# Altium PCB PCB1.PcbDoc
Units mil, origin at the board's own origin, x right, y up, seen from the top; angles counter-clockwise.
Board outline 7750 x 5745 mil, 4 copper layers (Top Layer, Plane (GRD), Plane (PWR - ask), Bottom Layer), stack 23.756 mil thick; 30 components, 20 nets, 64 pads, 0 vias.
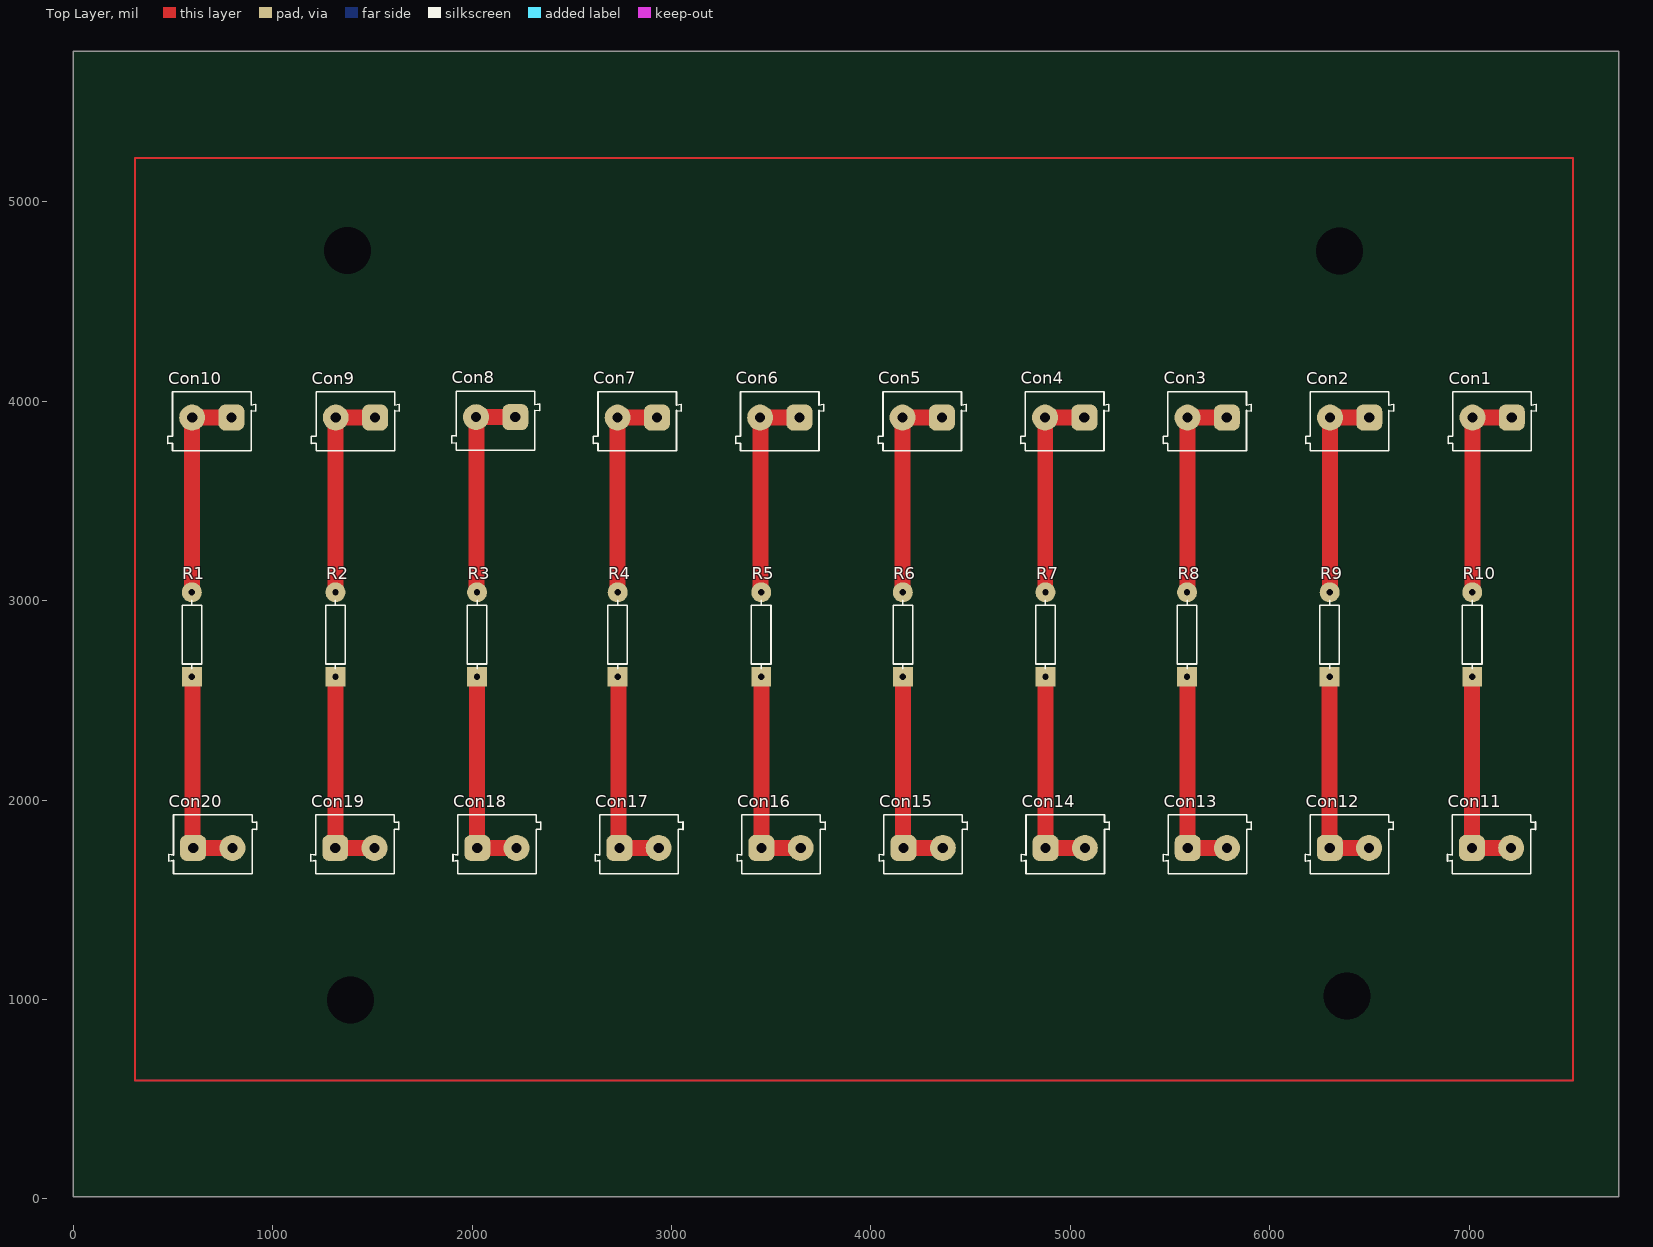
[diagram p0: Top Layer view]
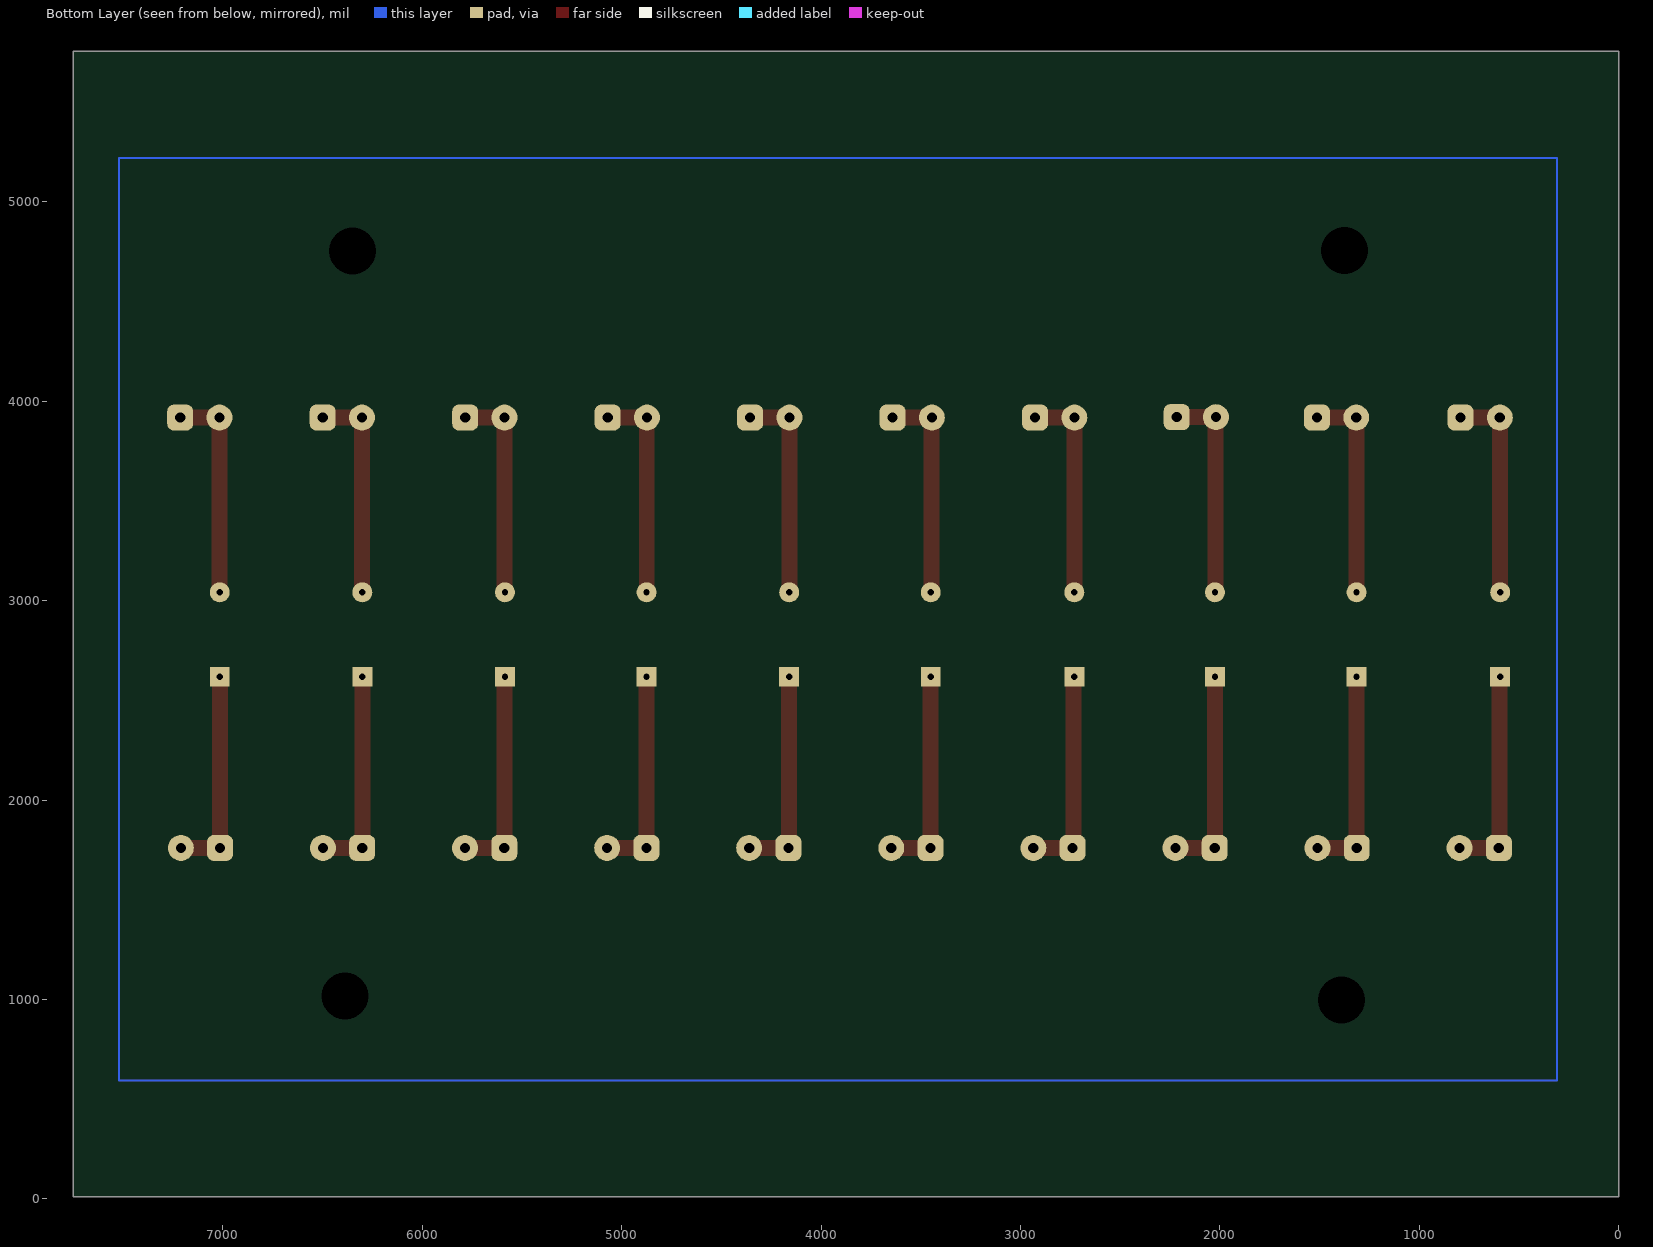
[diagram p1: Bottom Layer view, seen from below]
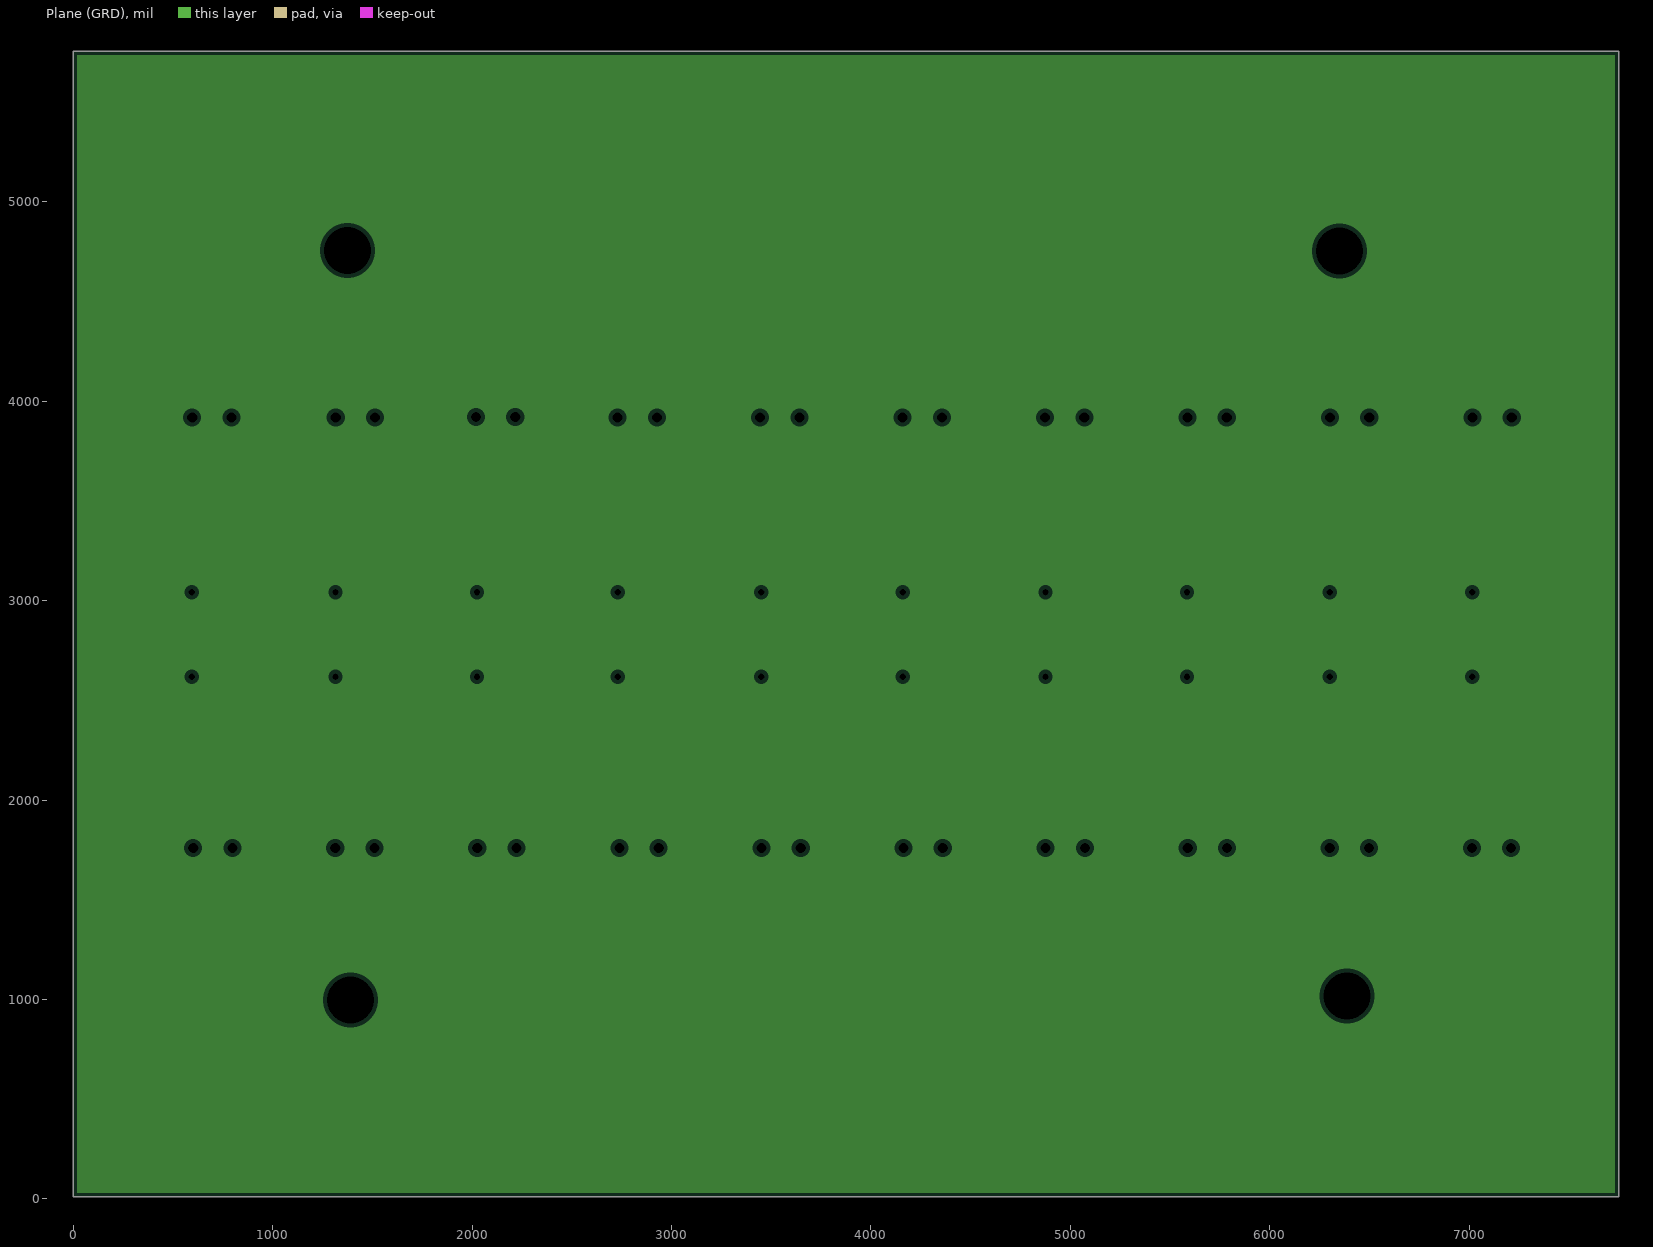
[diagram p2: Plane (GRD), clearances drawn from the general rule]
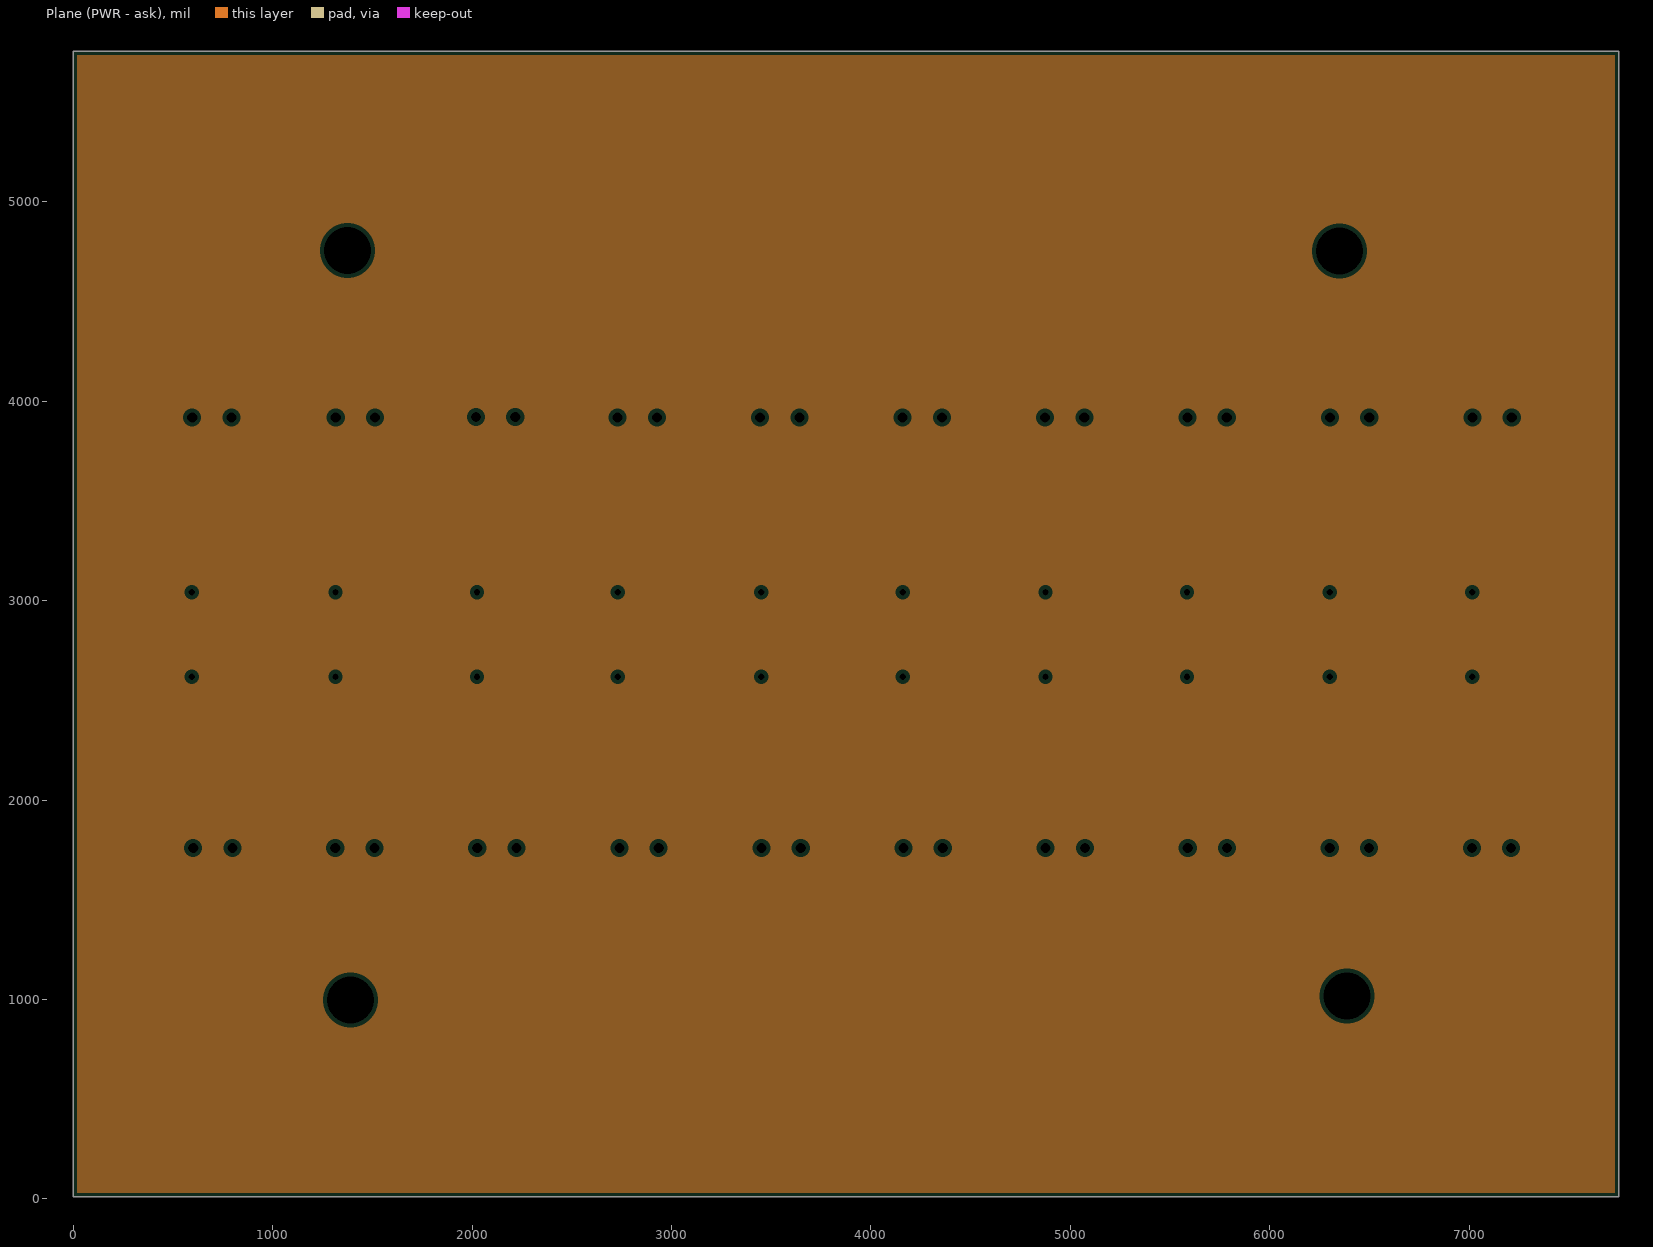
[diagram p3: Plane (PWR - ask), clearances drawn from the general rule]
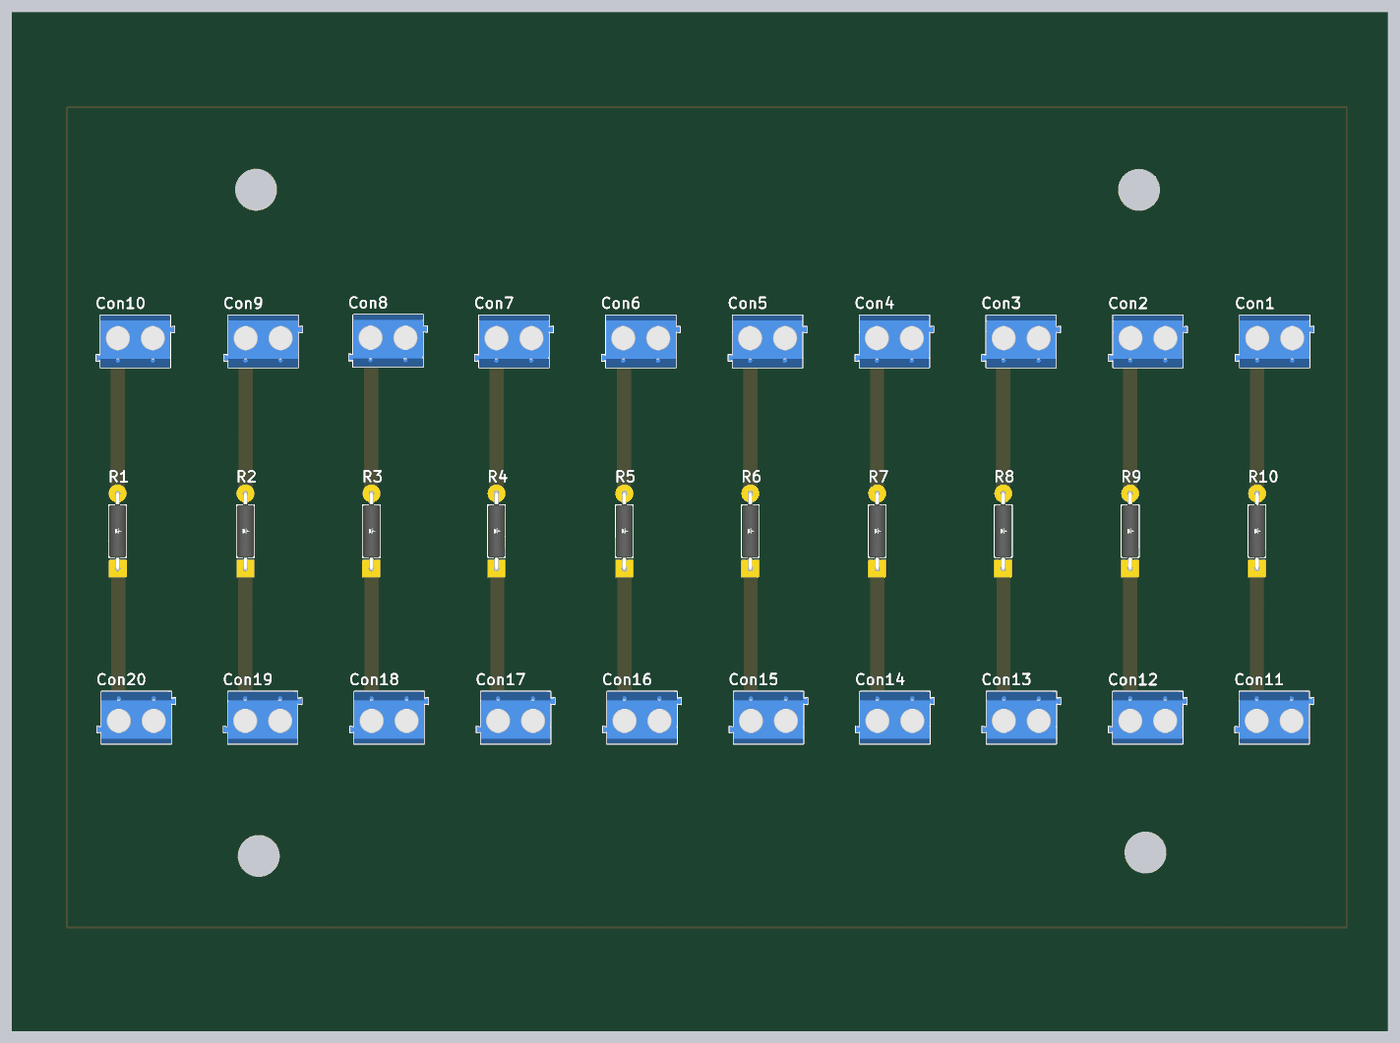
[diagram p4: 3D render of the assembled board from above, using the file's embedded part models]

## Layer stack, top to bottom
Top Solder: solder mask 0.4, Solder Resist, Dk 3.5
Top Layer: signal copper 1.4
Dielectric 2: prepreg 2.8, PP-006, Dk 4.1
Plane (GRD): plane copper 1.378
Dielectric 1: dielectric 12.6, FR-4, Dk 4.8
Plane (PWR - ask): plane copper 1.378
Dielectric 3: prepreg 2.8, PP-006, Dk 4.1
Bottom Layer: signal copper 1.4
Bottom Solder: solder mask 0.4, Solder Resist, Dk 3.5

## Board outline
0,5755 0,10 7750,10 7750,5755

## Design rules (kind name [scope] priority, off if disabled: settings)
Clearance [All] p1: gap=10 ignorepadtopadclearanceinfootprint=FALSE except(20: Arc-Fill Arc-Poly Arc-Region Track-Fill Track-Poly Track-Region SMDPad-Fill SMDPad-Poly SMDPad-Region THPad-Fill THPad-Poly THPad-Region Via-Fill Via-Poly Via-Region Fill-Fill Fill-Poly Fill-Region Poly-Poly Poly-Region Region-Region)
PlaneClearance [All] p1: clearance=20
PlaneConnect [All] p1: planeconnectstyle=Relief reliefexpansion=20 reliefentries=4 reliefconductorwidth=10 reliefairgap=10
PolygonConnect [All] p1: connectstyle=Relief reliefconductorwidth=10 reliefentries=4 polygonreliefangle="90 Angle" airgapwidth=10
RoutingVias [All] p1: holewidth=28 width=100 viastyle="Through Hole" minholewidth=28 minwidth=50 maxholewidth=28 maxwidth=100
SolderMaskExpansion [All] p1: expansion=4 istentingtop=FALSE
Width [All] p1: maxlimit=100 minlimit=5 preferedwidth=40 bottomlayer_maxwidth=50 minimp=50.000000 maximp=50.000000 favimp=50.000000 checkconnectedcopper=TRUE
28 further rules are at their usual default settings.

## Components (designator, comment, footprint, x,y, rotation, side; value= is the part's Value field where it differs from the comment)
Con1 "691102710002" 691102710002 7115,3900 r180 top
Con2 "691102710002" 691102710002 6400.56,3900 r180 top
Con3 "691102710002" 691102710002 5686.11,3900 r180 top
Con4 "691102710002" 691102710002 4971.67,3900 r180 top
Con5 "691102710002" 691102710002 4257.22,3900 r180 top
Con6 "691102710002" 691102710002 3542.78,3900 r180 top
Con7 "691102710002" 691102710002 2828.33,3900 r180 top
Con8 "691102710002" 691102710002 2118.43,3902.28 r180 top
Con9 "691102710002" 691102710002 1415,3900 r180 top
Con10 "691102710002" 691102710002 695,3900 r180 top
Con11 "691102710002" 691102710002 7111.57,1777.72 r0 top
Con12 "691102710002" 691102710002 6399.18,1777.72 r0 top
Con13 "691102710002" 691102710002 5686.78,1777.72 r0 top
Con14 "691102710002" 691102710002 4974.38,1777.72 r0 top
Con15 "691102710002" 691102710002 4261.99,1777.72 r0 top
Con16 "691102710002" 691102710002 3549.59,1777.72 r0 top
Con17 "691102710002" 691102710002 2837.19,1777.72 r0 top
Con18 "691102710002" 691102710002 2124.79,1777.72 r0 top
Con19 "691102710002" 691102710002 1412.4,1777.72 r0 top
Con20 "691102710002" 691102710002 700,1777.72 r0 top
R1 "CCF5526K7FKE36" FP-CCF55-MFG 595,2830 r90 top
R2 "CCF5526K7FKE36" FP-CCF55-MFG 1315,2830 r90 top
R3 "CCF5526K7FKE36" FP-CCF55-MFG 2025,2830 r90 top
R4 "CCF5526K7FKE36" FP-CCF55-MFG 2730,2830 r90 top
R5 "CCF5526K7FKE36" FP-CCF55-MFG 3450,2830 r90 top
R6 "CCF5526K7FKE36" FP-CCF55-MFG 4160,2830 r90 top
R7 "CCF5526K7FKE36" FP-CCF55-MFG 4875,2830 r90 top
R8 "CCF5526K7FKE36" FP-CCF55-MFG 5585,2830 r90 top
R9 "CCF5526K7FKE36" FP-CCF55-MFG 6300,2830 r90 top
R10 "CCF5526K7FKE36" FP-CCF55-MFG 7015,2830 r90 top

## Footprints (in the part's own frame and the unit in brackets; to place one, negate y for a bottom-side part, rotate by r counter-clockwise, add the part's x,y. Pads: shape width x height; smd on the part's side, far side on the other; paste and mask are expansions set on the pad)
691102710002 [mil] "5,00mm - modular - blue - Horizontal entry with pressure clamp - 9,9 mm height - 02p"
  rrect50% 130x130 hole 51.18: 1(-98.43,-17.72)
  round 130 hole 51.18: 2(98.43,-17.72)
  silkscreen extent -220,-148 220,148, body extent -220,-148 220,148, height 392
FP-CCF55-MFG [mm]
  rect 2.54x2.54 hole 0.8 paste-2539.97 mask+0: 1(-5.38,0)
  round 2.54 hole 0.8 paste-2539.97 mask+0: 2(5.38,0)
  silkscreen extent -4.33,-1.24 4.33,1.24, body extent -6.13,-1.35 6.13,1.35, height 0.25

## Part data
Con1 Con2 Con3 Con4 Con5 Con6 Con7 Con8 Con9 Con10 Con11 Con12 Con13 Con14 Con15 Con16 Con17 Con18 Con19 Con20: library part CMP-1502-03258-2, Color=Blue, Current=15A, Max Operating Temperature=105°C, Min Operating Temperature=-40°C, Voltage=300V, Contact Material=Brass, Contact Plating=Tin, Current Rating=15A, Height=13.4mm, Housing Material=Nylon, Lead Pitch=5mm, Length=7.5mm, Mount="Through Hole", NexarPartId=8917706, Number of Contacts=2, Number of Levels=1, Number of Pins=2, Number of Positions Per Level=2, Packaging=Box, Pitch=5.0038mm, Plating=Steel, REACH SVHC=Unknown, RoHS=Compliant, Stripping Length=-6mm, Termination=Screw, Voltage Rating=300V, Width=11.2mm, Wire Gauge (Max)=22AWG, Wire Gauge (Min)=14AWG, Wire/Cable Gauge=22AWG
R1 R2 R3 R4 R5 R6 R7 R8 R9 R10: library part CMP-00030-42465748-1, "CCF5526K7FKE36 Res Metal Film 26.7K Ohm 1% 1/4W 1/2W ±100ppm/°C Conformal AXL Thru-Hole T/R", Case/Package=Conformal, Max Operating Temperature=165°C, Min Operating Temperature=-65°C, Power Rating=500mW, Resistance=26.7kΩ, Temperature Coefficient=100ppm/°C, Tolerance=1%, Voltage Rating=250V, Composition="Metal Film", Contact Plating=Tin, Diameter=2.29mm, Lead Diameter=640µm, Lead Free="Lead Free", Length=6.73mm, Military Standard=Not, Mount="Through Hole", NexarPartId=42465748, Radiation Hardening=No, RoHS=Compliant, Termination=Axial

## Free pads (board coordinates)
  round 60 hole 236: Sc1(1390,997.84) Sc2(1375,4755) Sc3(6350,4754.08) Sc5(6386.56,1017.16)

## Nets (pads, with @x,y where several pads share a name; then routed paths per layer and width w, separated by ;. In a path a pad name is that pad's centre, name@x,y a point inside that pad or via, vN(x,y) a via of type N, cw(c..) or ccw(c..) an arc to the next point about the centre after c; other vN are vias at no path point)
ContoR1: Con10.1 Con10.2 R1.2 | length 1073.4
  Top Layer w80: R1.2 595.79,3042.6 595.79,3916.93 Con10.2 Con10.1
ContoR2: Con20.1 Con20.2 R1.1 | length 1057.8
  Top Layer w80: R1.1 598.29,2614.9 598.29,1763.29 Con20.1 Con20.2
ContoR3: Con9.1 Con9.2 R2.2 | length 1073.4
  Top Layer w80: R2.2 1315.79,3042.6 1315.79,3916.93 Con9.2 Con9.1
ContoR4: Con19.1 Con19.2 R2.1 | length 1055.5
  Top Layer w80: R2.1 1314.49,2617.68 1314.49,1760.51 Con19.1 Con19.2
ContoR5: Con8.1 Con8.2 R3.2 | length 1077.1
  Top Layer w80: R3.2 2022.5,3044.31 2022.5,3917.5 Con8.2 Con8.1
ContoR6: Con18.1 Con18.2 R3.1 | length 1055.6
  Top Layer w80: R3.1 2025.68,2617.5 2025.68,1760.68 Con18.1 Con18.2
ContoR7: Con7.1 Con7.2 R4.2 | length 1072.8
  Top Layer w80: R4.2 2729.95,3041.86 2729.95,3917.67 Con7.2 Con7.1
ContoR8: Con17.1 Con17.2 R4.1 | length 1058.7
  Top Layer w80: R4.1 2734.38,2613.81 2734.38,1764.38 Con17.1 Con17.2
ContoR9: Con6.1 Con6.2 R5.2 | length 1075.1
  Top Layer w80: R5.2 3447.18,3044.63 3447.18,3914.89 Con6.2 Con6.1
ContoR10: Con16.1 Con16.2 R5.1 | length 1055.5
  Top Layer w80: R5.1 3450.58,2617.61 3450.58,1760.58 Con16.1 Con16.2
ContoR11: Con5.1 Con5.2 R6.2 | length 1073.3
  Top Layer w80: R6.2 4159.4,3042.41 4159.4,3917.12 Con5.2 Con5.1
ContoR12: Con15.1 Con15.2 R6.1 | length 1056.5
  Top Layer w80: R6.1 4161.78,2616.41 4161.78,1761.78 Con15.1 Con15.2
ContoR13: Con4.1 Con4.2 R7.2 | length 1073.5
  Top Layer w80: R7.2 4874.12,3042.69 4874.12,3916.84 Con4.2 Con4.1
ContoR14: Con14.1 Con14.2 R7.1 | length 1055.4
  Top Layer w80: R7.1 4875.48,2617.71 4875.48,1760.48 Con14.1 Con14.2
ContoR15: Con3.1 Con3.2 R8.2 | length 1073.9
  Top Layer w80: R8.2 5586.34,3043.15 5586.34,3916.37 Con3.2 Con3.1
ContoR16: Con13.1 Con13.2 R8.1 | length 1056.4
  Top Layer w80: R8.1 5586.68,2616.51 5586.68,1761.68 Con13.1 Con13.2
ContoR17: Con2.1 Con2.2 R9.2 | length 1073.6
  Top Layer w80: R9.2 6301.07,3042.88 6301.07,3916.65 Con2.2 Con2.1
ContoR18: Con12.1 Con12.2 R9.1 | length 1055.4
  Top Layer w80: R9.1 6300.38,2617.81 6300.38,1760.38 Con12.1 Con12.2
ContoR19: Con1.1 Con1.2 R10.2 | length 1073.4
  Top Layer w80: R10.2 7015.79,3042.6 7015.79,3916.93 Con1.2 Con1.1
ContoR20: Con11.1 Con11.2 R10.1 | length 1055.8
  Top Layer w80: R10.1 7014.07,2617.26 7014.07,1760.93 Con11.1 Con11.2

## Polygon pours and split planes (outlines as drawn)
no net on Plane (GRD) (split plane): 7729.9,30.1 20.1,30.1 20.1,5734.9 7729.9,5734.9
no net on Plane (PWR - ask) (split plane): 7729.9,30.1 20.1,30.1 20.1,5734.9 7729.9,5734.9

## Other copper
Multi-Layer:
  lines w10: 310,595 7520,595 7520,5220 310,5220 310,595